# Altium PCB 智能输液器主板.pcbdoc
Units mil, origin at the board's own origin, x right, y up, seen from the top; angles counter-clockwise.
Board outline 5687.73 x 4055 mil, 2 copper layers (Top Layer, Bottom Layer); 58 components, 49 nets, 233 pads, 273 vias.
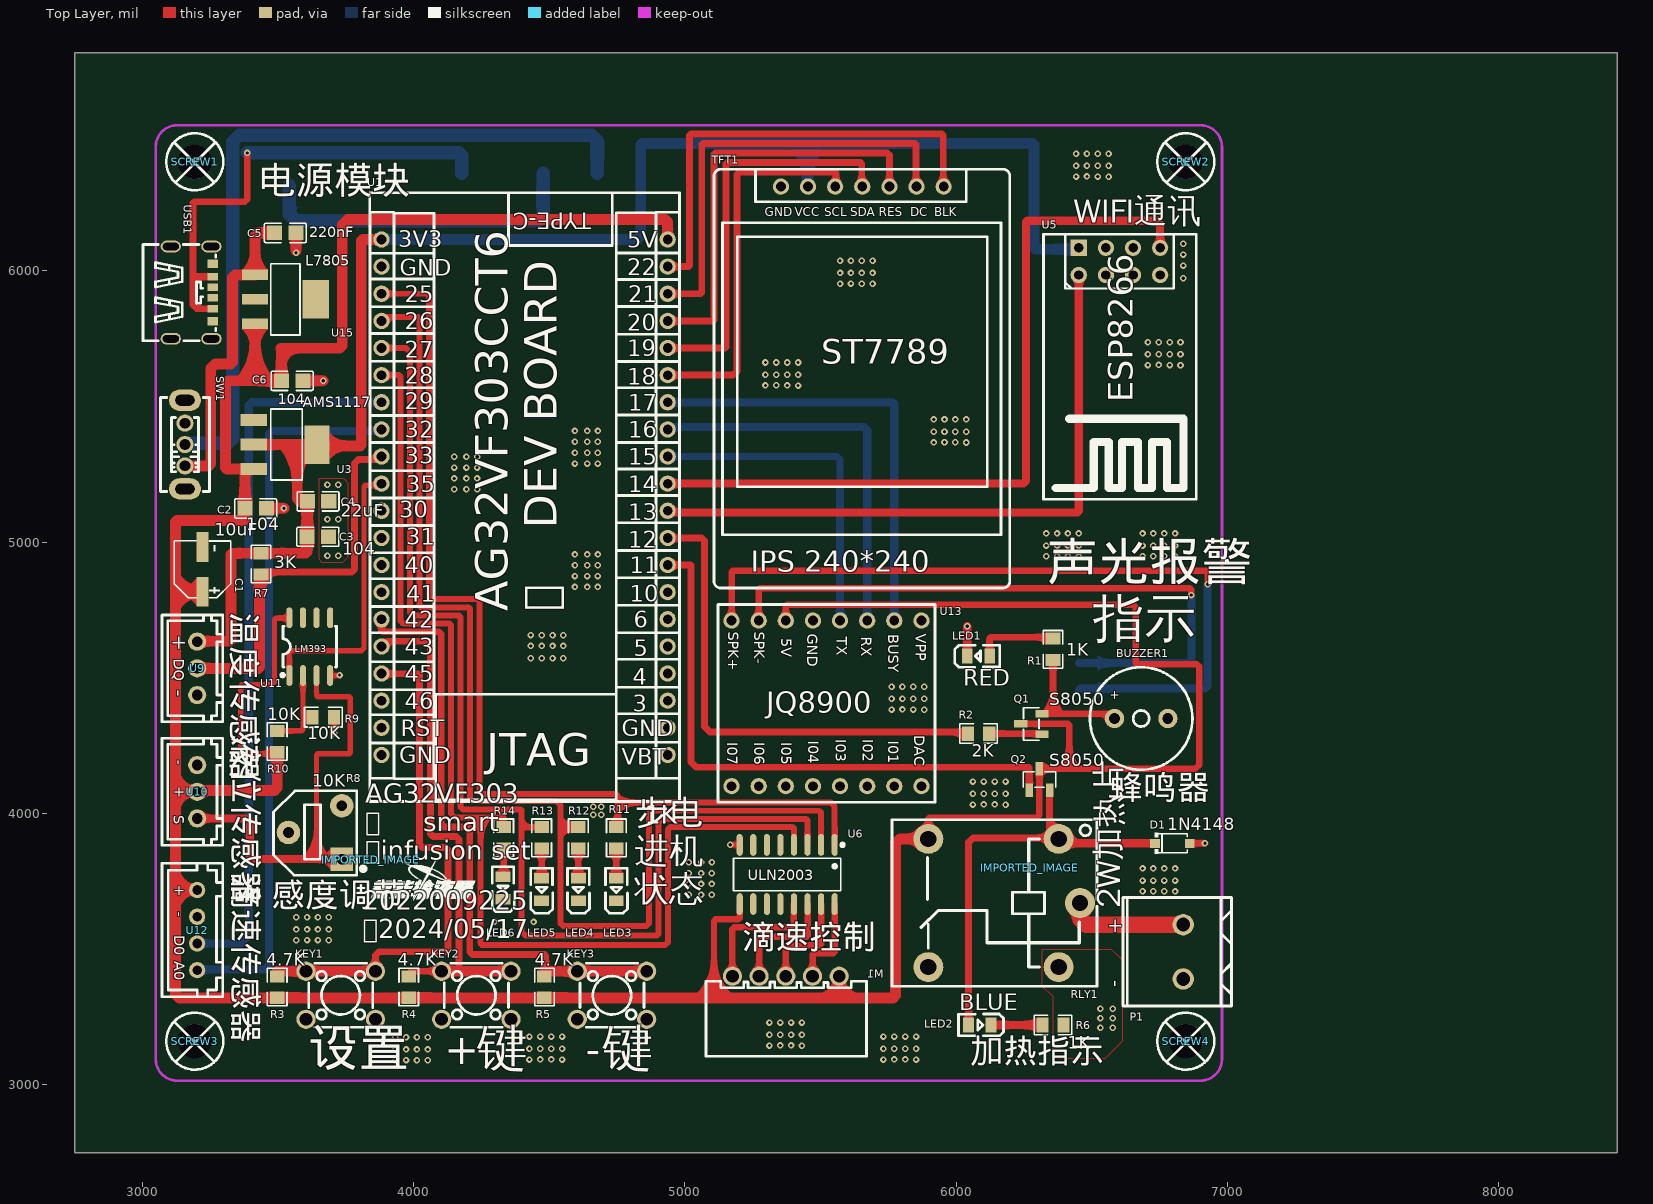
[diagram p0: Top Layer view]
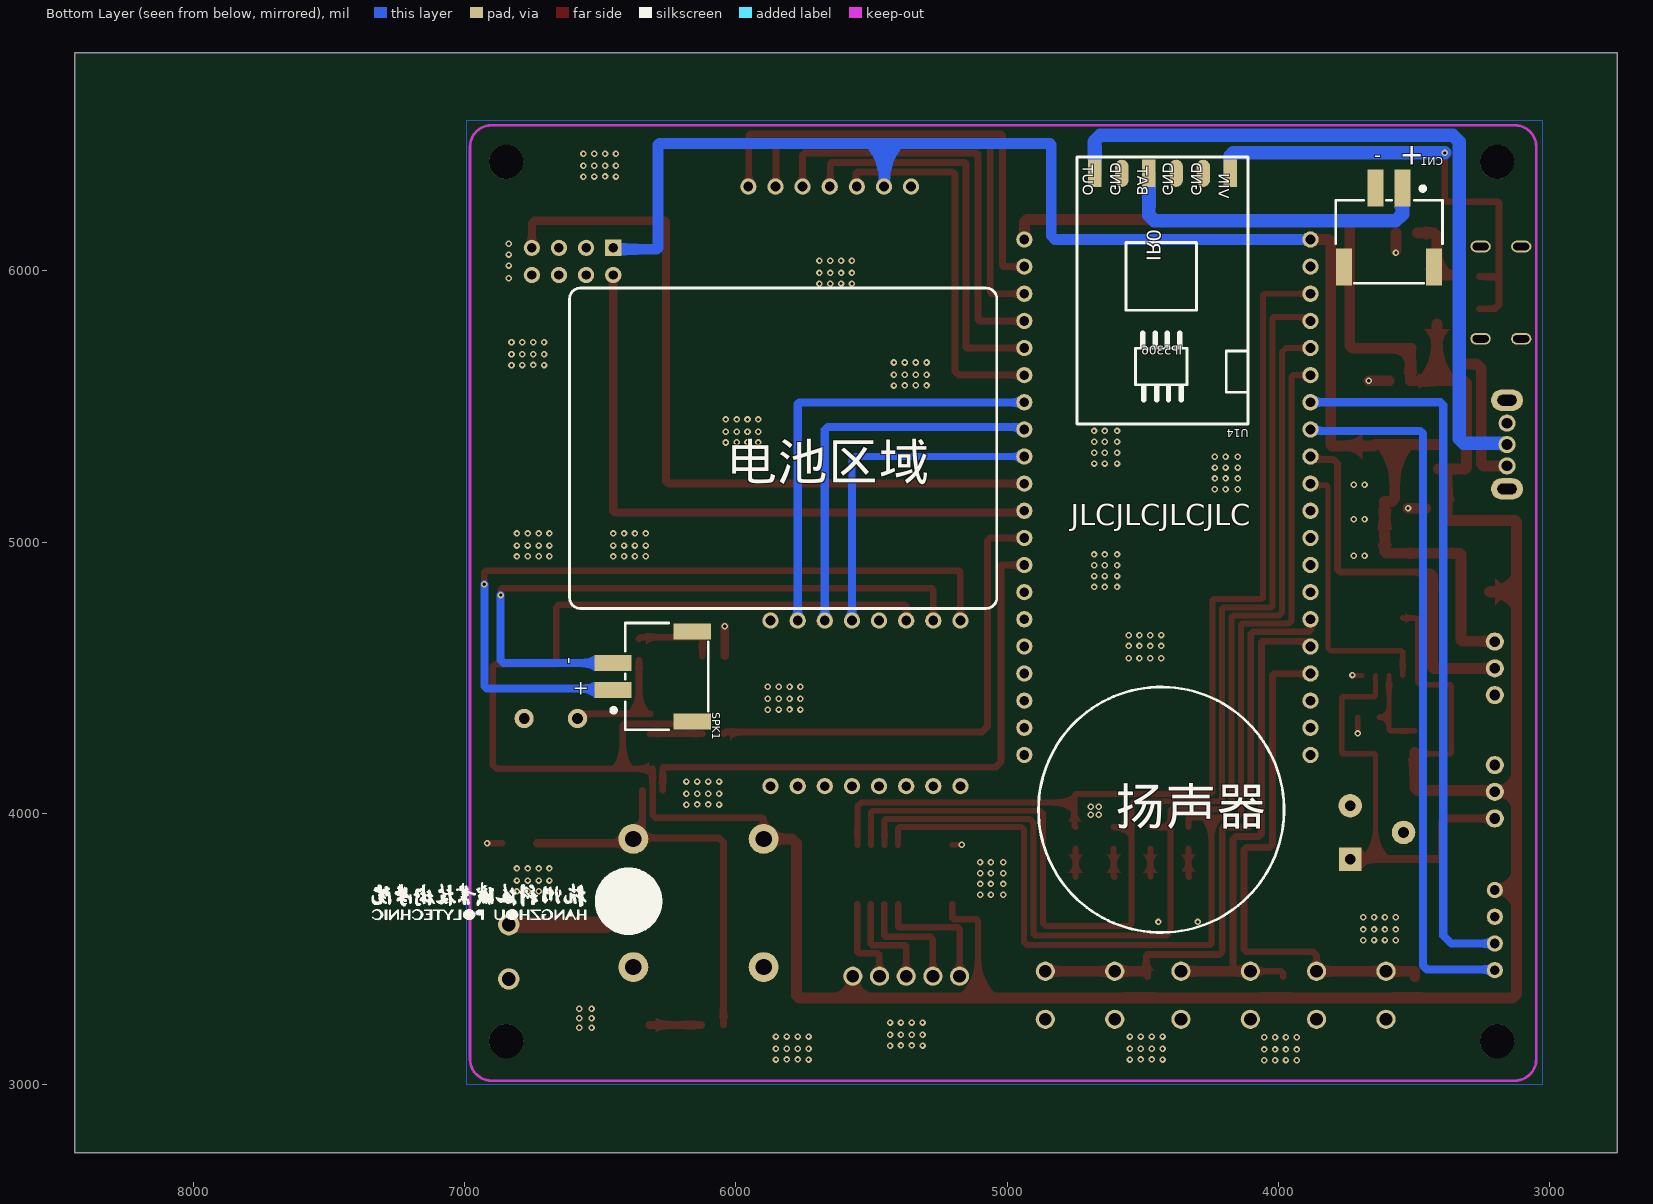
[diagram p1: Bottom Layer view, seen from below]

## Layer stack, top to bottom
Top Layer: signal copper (thickness not stored)
Dielectric: dielectric 12.6, FR-4, Dk 4.8
Bottom Layer: signal copper (thickness not stored)

## Board outline
8437.73,2750 2750,2750 2750,6805 8437.73,6805

## Components (designator, comment, footprint, x,y, rotation, side; value= is the part's Value field where it differs from the comment)
BUZZER1 "HNB09A05" BUZ-TH_BD9.6-P5.00-D0.7-FD 6681.99,4350 r0 top
C1 "RST10UF50V016" CAP-SMD_BD5.0-L5.3-W5.3-FD 3221.99,4900 r90 top
C2 "CC0805KRX7R9BB104" C0805 3417.62,5124.37 r180 top
C3 "CC0805KRX7R9BB104" C0805 3646.99,5020 r180 top
C4 "CL21A226MAQNNNE" C0805 3647.62,5150.63 r180 top
C5 "CL21B224KBFNNNE" C0805 3526.99,6140 r180 top
C6 "CC0805KRX7R9BB104" C0805 3551.99,5595 r180 top
CN1 "ZX-XH2.54-2PWT" conn-smd_2p-p2.54_megastar_zx-xh2.54-2pwt 3591.99,6160 r180 bottom
D1 "1N4148W_C727110" SOD-123_L3.1-W1.7-LS3.7-RD 6796.99,3890 r0 top
IMPORTED_IMAGE "IMPORTED_IMAGE" IMPORTED_IMAGE 6271.99,3800 r0 top
IMPORTED_IMAGE "IMPORTED_IMAGE" IMPORTED_IMAGE 3841.99,3830 r0 top
KEY1 "TS665CJ" SW-TH_4P-L6.0-W6.0-P4.50-LS6.5 3731.19,3329.74 r0 top
KEY2 "TS665CJ" SW-TH_4P-L6.0-W6.0-P4.50-LS6.5 4231.19,3329.74 r0 top
KEY3 "TS665CJ" SW-TH_4P-L6.0-W6.0-P4.50-LS6.5 4731.19,3329.74 r0 top
LED1 "NCD0805R1" LED0805-R-RD 6081.99,4580 r0 top
LED2 "NCD0805R1" LED0805-R-RD 6086.99,3220 r180 top
LED3 "NCD0805R1" LED0805-R-RD 4746.99,3720 r90 top
LED4 "NCD0805R1" LED0805-R-RD 4606.99,3720 r90 top
LED5 "NCD0805R1" LED0805-R-RD 4471.99,3720 r90 top
LED6 "NCD0805R1" LED0805-R-RD 4329.43,3725 r90 top
M1 "步进电机" conn-th_xh2.54-5aw 5371.99,3400 r0 top
P1 "WJ500V-5.08-2P" CONN-TH_2P-P5.00_WJ500V-5.08-2P 6836.99,3490 r90 top
Q1 "SS8050_C7420370" SOT-23-3_L2.9-W1.3-P1.90-LS2.4-BR 6276.99,4330 r0 top
Q2 "SS8050_C7420370" SOT-23-3_L2.9-W1.3-P1.90-LS2.4-BR 6306.99,4125 r270 top
R1 "0805W8F1001T5E" R0805 6356.99,4605 r90 top
R2 "0805W8F2001T5E" R0805 6082.62,4294.37 r0 top
R3 "0805W8F4701T5E" R0805 3496.99,3360 r270 top
R4 "0805W8F4701T5E" R0805 3981.99,3360 r270 top
R5 "0805W8F4701T5E" R0805 4481.99,3360 r270 top
R6 "0805W8F1001T5E" R0805 6356.99,3220 r0 top
R7 "0805W8F4701T5E" R0805 3436.99,4920 r270 top
R8 "RM065-103(10K)" RES-ADJ-SMD_RM065-V1 3636.99,3930 r90 top
R9 "0805W8F1002T5E_C17414" R0805 3666.99,4355 r180 top
R10 "0805W8F1002T5E_C17414" R0805 3496.99,4265 r270 top
R11 "0805W8F1001T5E" R0805 4746.99,3910 r270 top
R12 "0805W8F1001T5E" R0805 4606.99,3910 r270 top
R13 "0805W8F1001T5E" R0805 4471.99,3910 r270 top
R14 "0805W8F1001T5E" R0805 4331.99,3910 r270 top
RLY1 "SRD-05VDC-SL-C" RELAY-TH_SRD-XXVDC-XL-C 6176.99,3670 r180 top
SCREW1 "M3螺丝" M3螺丝 3195.69,6400 r0 top
SCREW2 "M3螺丝" M3螺丝 6849.07,6400 r0 top
SCREW3 "M3螺丝" M3螺丝 3195.73,3158.03 r0 top
SCREW4 "M3螺丝" M3螺丝 6849.07,3158 r0 top
SPK1 "扬声器" CONN-SMD_2P-P2.54_MEGASTAR_ZX-XH2.54-2PWT 6306.99,4505 r90 bottom
SW1 "SS12D07VG4 087" SW-TH_SS12D07VG4 3156.99,5360 r90 top
TFT1 "1.3寸TFT" 1.3寸TFT 5106.99,6375 r0 top
U1 "AG32F303DEVBOARD" "AG32VF303 DEV BOARD" 3836.99,4045 r0 top
U3 "AMS1117-3.3_C6186" SOT-223-3_L6.5-W3.4-P2.30-LS7.0-BR 3526.99,5360 r180 top
U5 "WIFI模块" ESP-01S 6451.99,5985 r0 top
U6 "ULN2003_C2829422" SOP-16_L9.9-W3.9-P1.27-LS6.0-BL 5376.99,3775 r180 top
U9 "DS18B20" DS18B20 3201.99,4535 r270 top
U10 "水位传感器" 水位传感器 3201.99,4080 r270 top
U11 "LM393DR" SOIC-8_L5.0-W4.0-P1.27-LS6.0-BL 3616.99,4615 r0 top
U12 "槽型光耦" 槽型光耦 3201.99,3570 r270 top
U13 "JQ8900" JQ8900 5921.99,4770 r270 top
U14 "充放电一体5V2A" 充放电一体5v2a 4111.99,6420 r0 bottom
U15 "LM7805MPX/NOPB" SOT-223-4_L6.5-W3.5-P2.30-LS7.0-BR 3526.99,5895 r180 top
USB1 "TYPE-C 6P(073)" TYPE-C-SMD_TYPE-C-6P 3181.99,5920 r270 top

## Footprints (in the part's own frame and the unit in brackets; to place one, negate y for a bottom-side part, rotate by r counter-clockwise, add the part's x,y. Pads: shape width x height; smd on the part's side, far side on the other; paste and mask are expansions set on the pad)
1.3寸TFT [mil]
  round 60 hole 36: 1(246.85,-64.17) 2(346.85,-64.17) 3(446.85,-64.17) 4(546.85,-64.17) 5(646.85,-64.17) 6(746.85,-64.17) 7(846.85,-64.17)
  silkscreen extent 0,-1544 1091,0
"AG32VF303 DEV BOARD" [mil]
  round 60 hole 36: 1(44.61,2070.87) 2(44.61,1970.87) 3(44.61,1870.87) 4(44.61,1770.87) 5(44.61,1670.87) 6(44.61,1570.87) 7(44.61,1470.87) 8(44.61,1370.87) 9(44.61,1270.87) 10(44.61,1170.87) 11(44.61,1070.87) 12(44.61,970.87) 13(44.61,870.87) 14(44.61,770.87) 15(44.61,670.87) 16(44.61,570.87) 17(44.61,470.87) 18(44.61,370.87) 19(44.61,270.87) 20(44.61,170.87) 21(1099.49,170.87) 22(1099.49,270.87) 23(1099.49,370.87) 24(1099.49,470.87) 25(1099.49,570.87) 26(1099.49,670.87) 27(1099.49,770.87) 28(1099.49,870.87) 29(1099.49,970.87) 30(1099.49,1070.87) 31(1099.49,1170.87) 32(1099.49,1270.87) 33(1099.49,1370.87) 34(1099.49,1470.87) 35(1099.49,1570.87) 36(1099.49,1670.87) 37(1099.49,1770.87) 38(1099.49,1870.87) 39(1099.49,1970.87) 40(1099.49,2070.87)
  silkscreen extent 1,-1 1143,2243
BUZ-TH_BD9.6-P5.00-D0.7-FD [mm]
  round 1.8 hole 1: 1(-2.5,0) 2(2.5,0)
  silkscreen extent -4.8,-4.8 4.8,4.8
C0805 [mm]
  rect 1.41x1.35 smd: 1(-1,0) 2(1,0)
  silkscreen extent -1.96,-0.9 1.96,0.9
CAP-SMD_BD5.0-L5.3-W5.3-FD [mm]
  rect 2.8x1.1 smd: 1(-2.1,0) 2(2.1,0)
  silkscreen extent -2.66,-2.62 2.66,2.65
conn-smd_2p-p2.54_megastar_zx-xh2.54-2pwt [mm]
  rect 1.5x3.5 smd: 1(1.25,3.7) 2(-1.25,3.7) 3(4.23,-3.7) 4(-4.23,-3.7)
  silkscreen extent -5,-5.21 5,3.85
CONN-SMD_2P-P2.54_MEGASTAR_ZX-XH2.54-2PWT [mm]
  rect 1.5x3.5 smd: 1(-1.25,3.7) 2(1.25,3.7) 3(-4.23,-3.7) 4(4.23,-3.7)
  silkscreen extent -5,-5.21 5,3.85
CONN-TH_2P-P5.00_WJ500V-5.08-2P [mm]
  round 2 hole 1.3: 1(-2.54,0) 2(2.54,0)
  silkscreen extent -5.08,-4.52 5.08,5.64
conn-th_xh2.54-5aw [mm]
  round 1.8 hole 1.199 copper offset 0,0: 1(-5,0) 2(-2.498,0) 3(0.002,0) 4(2.501,0) 5(5,0)
  silkscreen extent -7.48,-7.49 7.55,-0.48
DS18B20 [mm]
  round 1.7 hole 1: 1(-2.5,0) 2(0,0) 3(2.5,0)
  silkscreen extent -5,-3.3 5,2.4
ESP-01S [mil]
  rect 60x60 hole 35: 1(0,100)
  round 60 hole 35: 2(100,100) 3(200,100) 4(300,100) 5(0,0) 6(100,0) 7(200,0) 8(300,0)
  silkscreen extent -130,-826 433,150
IMPORTED_IMAGE [mil]
JQ8900 [mil]
  round 60 hole 36: 1(59.06,-50) 2(59.06,-150) 3(59.06,-250) 4(59.06,-350) 5(59.06,-450) 6(59.06,-550) 7(59.06,-650) 8(59.06,-750) 9(669.29,-750) 10(669.29,-650) 11(669.29,-550) 12(669.29,-450) 13(669.29,-350) 14(669.29,-250) 15(669.29,-150) 16(669.29,-50)
  silkscreen extent 0,-800 728,0
LED0805-R-RD [mm]
  rect 1x1.4 smd: 1(1.05,0) 2(-1.05,0)
  silkscreen extent -2.22,-1.04 1.99,1.01
M3螺丝 [mil]
  round 126 hole 126: 1(-2.5,2.5)
  silkscreen extent -107,-102 102,107
R0805 [mm]
  rect 1.133x1.377 smd: 1(-1,0) 2(1,0)
  silkscreen extent -1.76,-0.92 1.76,0.92
RELAY-TH_SRD-XXVDC-XL-C [mil]
  round 110 hole 60: 1(-200.79,-236.22) 2(279.52,-236.2) 3(279.53,236.2) 4(-200.79,236.22) 5(-279.53,0)
  silkscreen extent -342,-307 413,307
RES-ADJ-SMD_RM065-V1 [mm]
  rect 2.2x2.1 hole 1: 1(-2.5,-2.5)
  round 2.2 hole 1: 2(0,2.5) 3(2.5,-2.5)
  silkscreen extent -4,-4.7 3.9,3.9
SOD-123_L3.1-W1.7-LS3.7-RD [mm]
  rect 0.91x0.84 smd: 1(-1.63,0) 2(1.63,0)
  silkscreen extent -1.63,-0.98 1.4,0.98
SOIC-8_L5.0-W4.0-P1.27-LS6.0-BL [mil]
  oval 22.38x76.78 smd: 1(-75,-106.5) 2(-25,-106.5) 3(25,-106.5) 4(75,-106.5) 5(75,106.5) 6(25,106.5) 7(-25,106.5) 8(-75,106.5)
  silkscreen extent -106,-111 98,75
SOP-16_L9.9-W3.9-P1.27-LS6.0-BL [mil]
  oval 22.6x80.24 smd: 1(-175,-109.02) 2(-125,-109.02) 3(-75,-109.02) 4(-25,-109.02) 5(25,-109.02) 6(75,-109.02) 7(125,-109.02) 8(175,-109.02) 9(175,109.02) 10(125,109.02) 11(75,109.02) 12(25,109.02) 13(-25,109.02) 14(-75,109.02) 15(-125,109.02) 16(-175,109.02)
  silkscreen extent -210,-115 198,60
SOT-23-3_L2.9-W1.3-P1.90-LS2.4-BR [mm]
  rect 1.25x0.7 smd: 1(1,-0.95) 2(1,0.95) 3(-1,0)
  silkscreen extent -0.73,-1.53 0.73,1.53
SOT-223-3_L6.5-W3.4-P2.30-LS7.0-BR [mm]
  rect 2.5x1.1 smd: 1(2.97,-2.3) 2(2.97,0) 3(2.97,2.3)
  rect 2.34x3.6 smd: 4(-2.97,0)
  silkscreen extent -1.57,-3.33 1.37,3.33
SOT-223-4_L6.5-W3.5-P2.30-LS7.0-BR [mm]
  rect 2.47x0.98 smd: 1(2.835,-2.3) 2(2.835,0) 3(2.835,2.3)
  rect 2.47x3.6 smd: 4(-2.835,0)
  silkscreen extent -1.37,-3.33 1.37,3.33
SW-TH_4P-L6.0-W6.0-P4.50-LS6.5 [mm]
  round 1.8 hole 1.2: 1(-3.25,2.25) 2(3.25,2.25) 3(-3.25,-2.25) 4(3.25,-2.25)
  silkscreen extent -3,-3 3,3
SW-TH_SS12D07VG4 [mm]
  round 1.6 hole 1: 1(-2,0) 2(0,0) 3(2,0)
  oval 2x3 hole 1 slot 1.8 at 90 deg: 4(4.15,0) 5(-4.15,0)
  silkscreen extent -4.4,-2.3 4.4,2.3
TYPE-C-SMD_TYPE-C-6P [mm]
  oval 1.1x1.9 hole 0.7 slot 1.5 at 90 deg: 7(-4.32,-1.963) 7(-4.32,1.838) 7(4.32,-1.963) 7(4.32,1.838)
  rect 0.7x1 smd: A5(-0.5,1.963) A9(1.5,1.963) B5(0.5,1.963) B9(-1.5,1.963)
  rect 0.8x1 smd: A12(2.7,1.963) B12(-2.7,1.963)
  silkscreen extent -4.5,-4.56 4.5,2.24
充放电一体5v2a [mil]
  rect 50x100 smd: 1(65,60) 4(365,60) 6(565,60)
  oval 50x100 smd: 2(165,60) 3(265,60) 5(465,60)
  silkscreen extent 0,0 630,984
槽型光耦 [mil]
  round 60 hole 36: 1(-147.64,0) 2(-49.21,0.01) 3(49.21,0) 4(147.64,0.01)
  silkscreen extent -246,-130 246,94
水位传感器 [mm]
  round 1.7 hole 1: 1(-2.5,0) 2(0,0) 3(2.5,0)
  silkscreen extent -5,-3.3 5,2.4

## Via types
v1: diameter 24.02, hole 12.01, Top Layer to Bottom Layer, 273 vias

## Nets (pads, with @x,y where several pads share a name; then routed paths per layer and width w, separated by ;. In a path a pad name is that pad's centre, name@x,y a point inside that pad or via, vN(x,y) a via of type N, cw(c..) or ccw(c..) an arc to the next point about the centre after c; other vN are vias at no path point)
8266_RX: U1.30 U5.5 | length 2381.7
  Top Layer w30: U1.30@4942.34,5110 6446.99,5110 6451.99,5115 U5.5
8266_TX: U1.31 U5.4 | length 2870.5
  Top Layer w30: U1.31 6247.85,5215.87 6256.99,5225 6256.99,6180 6261.99,6185 6741.99,6185 6751.99,6175 U5.4
$1N2864: LED1.1 R1.2 | length 303.8
  Top Layer w24: LED1.1 6123.34,4646.35 6126.99,4650 6351.36,4650 R1.2
$1N2874: BUZZER1.1 Q1.2 R1.1 | length 474.7
  Top Layer w24: Q1.2 6361.93,4367.4 ; R1.1 6356.99,4372.35 6361.93,4367.4 ; BUZZER1.1 6566.16,4367.4 6361.93,4367.4
$1N2928: Q1.1 R2.2 | length 195.1
  Top Layer w24: R2.2 6314.59,4294.37 Q1.1
$1N8956: P1.2 RLY1.5 | length 447.8
  Top Layer w60: RLY1.5 6456.52,3611.57 6478.09,3590 P1.2
$1N9207: LED2.2 R6.1 | length 189.3
  Top Layer w30: LED2.2 R6.1
$1N9226: D1.1 LED2.1 Q2.2 RLY1.1 | length 1563.8
  Top Layer w25: LED2.1 6045.64,3893.65 6061.99,3910 RLY1.1@6374,3910 ; Q2.2 6344.39,3939.61 RLY1.1@6374,3910 ; RLY1.1 RLY1.1@6374,3910
  Top Layer w30: RLY1.1 6394,3890 D1.1
$1N18974: R9.2 R10.1 U11.2 | length 333.5
  Top Layer w20: R10.1 3586.36,4304.37 3591.99,4310 3591.99,4360 ; U11.2 3591.99,4360 ; R9.2 3596.99,4355 3591.99,4360
$1N21189: SPK1.1 U13.8 | length 2838.4
  Top Layer w24: U13.8 5171.99,4890 5176.99,4895 6921.99,4895 6926.98,4890.01 v1(6926.99,4845)
  Bottom Layer w30: SPK1.1 6456.88,4460 6916.99,4460 6926.99,4470 v1(6926.99,4845)
$1N21198: SPK1.2 U13.7 | length 2392
  Top Layer w24: U13.7 5271.99,4825 5276.99,4830 6861.99,4830 6866.99,4825 v1(6866.99,4805)
  Bottom Layer w30: SPK1.2 6856.2,4554.22 6866.99,4565 v1(6866.99,4805)
$1N31746: LED3.1 R11.2 | length 104.3
  Top Layer w22: LED3.1@4746.99,3766.35 R11.2
$1N31792: LED4.1 R12.2 | length 105.3
  Top Layer w22: LED4.1@4604.47,3766.35 4606.99,3768.87 R12.2
$1N31838: LED5.1 R13.2 | length 102.7
  Top Layer w22: LED5.1@4471.99,3767.94 R13.2
$1N31884: LED6.1 R14.2 | length 105.3
  Top Layer w22: LED6.1 4331.99,3768.91 R14.2
+5V: C1.1 C2.2 C6.2 M1.5 Q1.3 Q2.3 R3.2 R4.2 R5.2 R10.2 RLY1.2 U1.40 U3.3 U6.9 U10.2 U11.8 U12.1 U13.6 U15.3 | length 14222.9
  Top Layer w20: R10.2 3491.36,4220 3366.99,4220 3361.99,4225 3361.99,4470 3366.99,4475 3476.99,4475 3486.99,4485 3486.99,4715 3491.99,4720 3540.49,4720 U11.8
  Top Layer w23: 5106.99,3320 5106.99,3604.02 5112.97,3610 5196.99,3610 5201.99,3615 U6.9
  Top Layer w24: U13.6 5371.99,4765 5376.99,4770 6651.99,4770 6661.99,4760 6661.99,4555 6666.99,4550 6886.99,4550 6896.99,4540 6896.99,4180 6881.36,4164.37 6411.36,4164.37 ; RLY1.2 5897.46,3980.47 5901.99,3985 6296.99,3985 6306.99,3995 Q2.3 6411.36,4164.37 ; Q1.3 6411.99,4330 6416.99,4325 6416.99,4170 6411.36,4164.37
  Top Layer w40: U12.1 3199.63,3720 3126.99,3720 3121.99,3725 ; C1.1 3121.99,4817.32 ; U3.3 U3.3@3396.44,5269.45 ; U15.3 3415.38,5595.39 3414.99,5595 ; R10.2 3496.99,4095 3486.99,4085 3206.99,4085 U10.2 3198.74,4083.24 3121.99,4083.24 ; U1.40 4936.47,6180.51 4926.99,6190 3756.99,6190 3736.99,6170 3736.99,5725 3726.99,5715 3511.06,5715 3512.62,5713.45 C6.2 3414.99,5595 ; M1.5 5568.84,3322.92 5571.75,3320 ; RLY1.2 5793.19,3906.2 5776.99,3890 5776.99,3330 5766.99,3320 5571.75,3320 ; 3121.99,3725 3121.99,3335 3136.99,3320 5106.99,3320 5571.75,3320 ; 3121.99,3725 3121.99,4083.24 ; 3121.99,4083.24 3121.99,4817.32 ; 3121.99,4817.32 3121.99,5075 3126.99,5080 3371.99,5080 3378.25,5086.26 C2.2 3378.25,5251.26 U3.3@3396.44,5269.45 ; U3.3@3396.44,5269.45 3312.54,5269.45 3306.99,5275 3306.99,5585 3316.99,5595 3414.99,5595
A0: U1.8 U12.4 | length 2650.2
  Bottom Layer w30: U12.4 3204.63,3425 3451.99,3425 3466.99,3440 3466.99,5400 3476.99,5410 U1.8@3880.73,5410
ALARM: R2.1 U1.29 | length 1806.9
  Top Layer w25: U1.29 4937.34,5015 5061.99,5015 5071.99,5005 5071.99,4320 5091.99,4300 6037.62,4300 R2.1
D0: U1.7 U12.3 | length 2651.7
  Bottom Layer w30: U12.3 3362.78,3520.79 3391.99,3550 3391.99,5505.87 3401.99,5515.87 U1.7
GND: BUZZER1.2 C1.2 C2.1 C3.1 C4.1 C5.1 C6.1 CN1.2 CN1.3 CN1.4 D1.2 KEY1.3 KEY1.4 KEY2.3 KEY2.4 KEY3.3 KEY3.4 LED1.2 LED3.2 LED4.2 LED5.2 LED6.2 P1.1 R6.2 R8.2 R8.3 R9.1 RLY1.4 SCREW1.1 SCREW2.1 SCREW3.1 SCREW4.1 TFT1.1 U1.2 U1.20 U1.22 U3.1 U5.8 U6.8 U9.3 U10.1 U11.4 U12.2 U13.5 U14.2 U14.3 U14.5 U15.2 U15.4 USB1.A12 USB1.B12 | length 503
  Top Layer w20: U11.4 3725.49,4508.5 v1(3726.99,4510) ; R9.1 3706.99,4354.37 v1(3706.99,4295) ; v1(5166.99,3885) 5201.01,3885 U6.8
  Top Layer w25: D1.2 v1(6916.99,3890)
  Top Layer w30: LED1.2 v1(6040.64,4690)
  Top Layer w40: C2.1 3457.62,5125 v1(3521.99,5125) ; v1@3566.36,6075 C5.1 ; C6.1 v1(3666.99,5595)
  other v1: 3931.99,3090.37 4051.99,3090.09 3971.99,3090.92 4011.99,3090.64 4426.99,3092.82 4466.99,3093.38 4506.99,3093.1 4546.99,3092.54 5731.99,3092.82 5771.99,3093.38 5811.99,3093.1 5851.99,3092.54 3931.99,3130 3971.99,3130 4011.99,3130 4051.99,3130 4426.99,3132.46 4466.99,3132.46 4506.99,3132.46 4546.99,3132.46 5731.99,3132.46 5771.99,3132.46 5811.99,3132.46 5851.99,3132.46 5311.42,3144.34 5431.42,3144.07 5351.42,3144.9 5391.42,3144.62 3931.99,3175 3971.99,3175 4011.99,3175 4051.99,3175 4426.99,3177.46 4466.99,3177.46 4506.99,3177.46 4546.99,3177.46 5731.99,3177.46 5771.99,3177.46 5811.99,3177.46 5851.99,3177.46 5311.42,3183.98 5351.42,3183.98 5391.42,3183.98 5431.42,3183.98 6531.99,3210 6576.99,3210 5311.42,3228.98 5351.42,3228.98 5391.42,3228.98 5431.42,3228.98 6531.99,3245 6576.99,3245 6531.99,3280 6576.99,3280 3566.99,3532.82 3606.99,3533.38 3646.99,3533.1 3686.99,3532.54 3566.99,3572.46 3606.99,3572.46 3646.99,3572.46 3686.99,3572.46 4296.99,3600 4441.99,3600 3566.99,3617.46 3606.99,3617.46 3646.99,3617.46 3686.99,3617.46 5014.53,3700 5059.53,3700 5099.16,3700 6686.99,3712.82 6726.99,3713.38 6766.99,3713.1 6806.99,3712.54 5014.53,3740 5059.53,3740 5098.61,3740 6686.99,3752.46 6726.99,3752.46 6766.99,3752.46 6806.99,3752.46 5014.53,3780 5059.53,3780 5098.88,3780 6686.99,3797.46 6726.99,3797.46 6766.99,3797.46 6806.99,3797.46 5014.53,3820 5059.53,3820 5099.44,3820 4661.99,3995 4691.99,3995 4661.99,4025 4691.99,4025 6061.99,4032.82 6101.99,4033.38 6141.99,4033.1 6181.99,4032.54 6061.99,4072.46 6101.99,4072.46 6141.99,4072.46 6181.99,4072.46 6061.99,4117.46 6101.99,4117.46 6141.99,4117.46 6181.99,4117.46 5761.99,4382.82 5801.99,4383.38 5841.99,4383.1 5881.99,4382.54 5761.99,4422.46 5801.99,4422.46 5841.99,4422.46 5881.99,4422.46 5761.99,4467.46 5801.99,4467.46 5841.99,4467.46 5881.99,4467.46 4431.99,4572.54 4471.99,4572.54 4511.99,4572.54 4551.99,4572.54 4431.99,4617.54 4471.99,4617.54 4511.99,4617.54 4551.99,4617.54 4431.99,4657.46 4471.99,4656.9 4511.99,4656.62 4551.99,4657.18 4594.53,4835 4639.53,4835 4679.16,4835 4594.53,4875 4639.53,4875 4678.61,4875 4594.53,4915 4639.53,4915 4678.88,4915 6331.99,4947.82 6371.99,4948.38 6411.99,4948.1 6451.99,4947.54 6686.99,4947.82 6726.99,4948.38 6766.99,4948.1 6806.99,4947.54 3681.99,4950 3721.99,4950 4594.53,4955 4639.53,4955 4679.44,4955 6331.99,4987.46 6371.99,4987.46 6411.99,4987.46 6451.99,4987.46 6686.99,4987.46 6726.99,4987.46 6766.99,4987.46 6806.99,4987.46 6331.99,5032.46 6371.99,5032.46 6411.99,5032.46 6451.99,5032.46 6686.99,5032.46 6726.99,5032.46 6766.99,5032.46 6806.99,5032.46 3681.99,5085 3721.99,5085 4149.53,5195 4194.53,5195 4234.16,5195 3681.99,5211.98 3721.99,5211.98 4149.53,5235 4194.53,5235 4233.61,5235 4149.53,5275 4194.53,5275 4233.88,5275 4594.53,5290 4639.53,5290 4679.16,5290 4149.53,5315 4194.53,5315 4234.44,5315 4594.53,5330 4639.53,5330 4678.61,5330 5916.99,5367.82 5956.99,5368.38 5996.99,5368.1 6036.99,5367.54 4594.53,5370 4639.53,5370 4678.88,5370 5916.99,5407.46 5956.99,5407.46 5996.99,5407.46 6036.99,5407.46 4594.53,5410 4639.53,5410 4679.44,5410 5916.99,5452.46 5956.99,5452.46 5996.99,5452.46 6036.99,5452.46 5296.99,5577.82 5336.99,5578.38 5376.99,5578.1 5416.99,5577.54 5296.99,5617.46 5336.99,5617.46 5376.99,5617.46 5416.99,5617.46 6706.99,5652.82 6746.99,5653.38 6786.99,5653.1 6826.99,5652.54 5296.99,5662.46 5336.99,5662.46 5376.99,5662.46 5416.99,5662.46 6706.99,5692.46 6746.99,5692.46 6786.99,5692.46 6826.99,5692.46 6706.99,5737.46 6746.99,5737.46 6786.99,5737.46 6826.99,5737.46 5571.99,5952.82 5611.99,5953.38 5651.99,5953.1 5691.99,5952.54 6836.99,5972.94 5571.99,5992.46 5611.99,5992.46 5651.99,5992.46 5691.99,5992.46 6836.99,6020 5571.99,6037.46 5611.99,6037.46 5651.99,6037.46 5691.99,6037.46 6836.99,6060.53 3566.36,6067.28 6836.99,6100 6441.99,6347.82 6481.99,6348.38 6521.99,6348.1 6561.99,6347.54 6441.99,6387.46 6481.99,6387.46 6521.99,6387.46 6561.99,6387.46 6441.99,6432.46 6481.99,6432.46 6521.99,6432.46 6561.99,6432.46
IN1: R11.1 U1.3 U6.1 | length 3769.4
  Top Layer w22: U1.3 4051.12,5915.87 4056.99,5910 4056.99,4795 4061.99,4790 4237.89,4790 4241.99,4785.91 4241.99,4080 4250.99,4071 4745.99,4071 4751.99,4065 4751.99,4040 ; R11.1 4751.99,3954.37 4751.99,4040 ; U6.1 5551.99,4026.29 5538.28,4040 4751.99,4040
IN2: R12.1 U1.4 U6.2 | length 4443.9
  Top Layer w22: U1.4 3895.73,5830 4016.99,5830 4021.99,5825 4021.99,4765 4026.99,4760 4201.99,4760 4206.99,4755 4206.99,4055 4216.99,4045 4526.99,4045 4541.99,4030 4541.99,3945 ; R12.1 4546.36,3949.37 4541.99,3945 ; U6.2 5501.99,4003 5494.99,4010 4876.99,4010 4866.99,4000 4866.99,3595 4856.99,3585 4551.99,3585 4541.99,3595 4541.99,3945
IN3: R13.1 U1.5 U6.3 | length 4292.1
  Top Layer w22: U1.5 3971.12,5715.87 3986.99,5700 3986.99,4740 3996.99,4730 4166.99,4730 4171.99,4725 4171.99,4025 4181.99,4015 4394.11,4015 4396.99,4012.12 4396.99,3940 ; R13.1 4406.36,3949.37 4396.99,3940 ; U6.3 5451.99,3975 5446.99,3980 4916.99,3980 4901.99,3965 4901.99,3555 4896.99,3550 4411.99,3550 4396.99,3565 4396.99,3940
IN4: R14.1 U1.6 U6.4 | length 4203.4
  Top Layer w22: U1.6 3946.12,5615.87 3951.99,5610 3951.99,4710 3961.99,4700 4131.99,4700 4136.99,4695 4136.99,4000 4151.99,3985 4246.99,3985 ; R14.1 4331.99,3985 4246.99,3985 ; U6.4 5401.99,3944.37 5396.99,3949.37 4946.36,3949.37 4936.99,3940 4936.99,3525 4926.99,3515 4251.99,3515 4246.99,3520 4246.99,3985
JQ_BUSY: U1.34 U13.2 | length 1621
  Bottom Layer w30: U1.34@4951.59,5515 5766.12,5515 5771.99,5509.13 U13.2
JQ_RX: U1.33 U13.3 | length 1428.1
  Bottom Layer w30: U1.33@4951.59,5425 5661.12,5425 5671.99,5414.13 U13.3
JQ_TX: U1.32 U13.4 | length 1234.1
  Bottom Layer w25: U1.32 5561.12,5315.87 5571.99,5305 5571.99,5224.13
  Bottom Layer w30: U13.4 5571.99,5224.13
K1: KEY1.1 KEY1.2 R3.1 U1.17 | length 1963.4
  Top Layer w25: KEY1.2 3859.14,3477.15 3871.99,3490 4116.99,3490 4126.99,3500 4126.99,3865 4116.99,3875 4031.99,3875 4021.99,3885 4021.99,4510 4016.99,4515 3882.46,4515 U1.17
  Top Layer w40: R3.1 3496.99,3418.32 KEY1.1 KEY1.2
K2: KEY2.1 KEY2.2 R4.1 U1.16 | length 1886.5
  Top Layer w25: U1.16 3900.73,4635 4056.99,4635 4061.99,4630 4061.99,3925 4071.99,3915 4156.99,3915 4166.99,3905 4166.99,3418.39 ; R4.1 3981.99,3410 3990.31,3418.32 KEY2.1
  Top Layer w40: KEY2.1 KEY2.2
K3: KEY3.1 KEY3.2 R5.1 U1.15 | length 2271.6
  Top Layer w25: U1.15 3881.59,4675.39 3886.99,4670 4091.99,4670 4101.99,4660 4101.99,3960 4111.99,3950 4201.99,3950 4206.99,3945 4206.99,3490 4216.99,3480 4481.99,3480 4486.99,3475 4486.99,3413.32 4486.99,3404.37 R5.1
  Top Layer w40: R5.1@4486.99,3413.32 4491.99,3418.32 KEY3.1 KEY3.2
O1: M1.1 U6.13 | length 485.9
  Top Layer w24: M1.1 5175.14,3573.15 5181.99,3580 5396.99,3580 5401.99,3585 U6.13
O2: M1.2 U6.14 | length 436.5
  Top Layer w24: M1.2 5273.64,3536.65 5281.99,3545 5446.99,3545 5451.99,3550 U6.14
O3: M1.3 U6.15 | length 390.1
  Top Layer w24: M1.3 5372.04,3510.05 5376.99,3515 5496.99,3515 5501.99,3520 U6.15
O4: M1.4 U6.16 | length 340.8
  Top Layer w24: M1.4 5470.44,3478.45 5476.99,3485 5546.99,3485 5551.99,3490 U6.16
RELAY: Q2.1 U1.28 | length 2149.6
  Top Layer w25: U1.28 5021.12,4915.87 5021.99,4915 5021.99,4190 5041.99,4170 6266.99,4170 6269.59,4167.4 Q2.1
TEMP: R7.2 U1.9 U9.2 | length 1419.2
  Top Layer w25: R7.2@3441.99,4890 3771.99,4890 3781.99,4900 3781.99,5290 3796.99,5305 3870.73,5305 U1.9
  Top Layer w40: U9.2 3426.98,4534.99 3431.99,4540 3431.99,4875.63 R7.2
TFT_BLK: TFT1.7 U1.39 | length 1691.3
  Top Layer w25: U1.39 5012.85,6015.87 5016.99,6020 5016.99,6500 5021.99,6505 5946.99,6505 5951.99,6500 5951.99,6312.68 TFT1.7
TFT_DC: TFT1.6 U1.38 | length 1620.8
  Top Layer w25: U1.38 5056.99,5915.87 5061.99,5920.87 5061.99,6465 5066.99,6470 5846.99,6470 5851.99,6465 5851.99,6312.68 TFT1.6
TFT_MOSI: TFT1.4 U1.36 | length 1481.3
  Top Layer w25: U1.36 5147.85,5715.87 5151.99,5720 5151.99,6395 5156.99,6400 5646.99,6400 5651.99,6395 5651.99,6312.68 TFT1.4
TFT_RES: TFT1.5 U1.37 | length 1551.4
  Top Layer w25: U1.37 4937.34,5815 5101.99,5815 5106.99,5820 5106.99,6430 5111.99,6435 5745.99,6435 5753.84,6427.15 TFT1.5
TFT_SCK: TFT1.3 U1.35 | length 1408.1
  Top Layer w25: U1.35 5177.85,5615.87 5191.99,5630 5191.99,6355 5201.99,6365 5551.99,6365 5556.99,6360 5556.99,6313.98 TFT1.3
VBAT: CN1.1 U14.4 | length 1213.5
  Bottom Layer w50: CN1.1@3541.99,6314.89 3541.99,6210 3566.99,6185 4456.99,6185 4476.99,6205 U14.4
VCC: C3.2 C4.2 R7.1 TFT1.2 U1.1 U3.2 U3.4 U5.1 U9.1 | length 5841.3
  Top Layer w40: U9.1 3203.56,4635 3321.99,4635 3326.99,4640 3326.99,4955 3331.36,4959.37 R7.1 3601.36,4959.37 3606.99,4965 3606.99,5019.37 C3.2 3608.25,5020.63 C4.2 3581.36,5150.63 3570.7,5161.29 3570.7,5360 ; U3.2 3570.7,5360 ; U1.1 3812.85,6115.87 3806.99,6110 3806.99,5360 3801.99,5355 3648.91,5355 U3.4 3570.7,5360
  Bottom Layer w40: U1.1 4822.85,6115.87 4836.99,6130 4836.99,6465 4841.99,6470 5446.99,6470 ; TFT1.2 5451.99,6312.68 5451.99,6465 5446.99,6470 ; U5.1@6451.99,6080 6291.99,6080 6286.99,6085 6286.99,6465 6281.99,6470 5446.99,6470
VIN: U14.1 USB1.A9 USB1.B9 | length 1766.5
  Top Layer w25: USB1.A9 3201.04,5860.94 3186.99,5875 3186.99,5965 ; USB1.B9 3201.04,5979.06 3186.99,5965 ; v1(3386.99,6435) 3386.99,6265 3376.99,6255 3191.99,6255 3186.99,6250 3186.99,5965
  Bottom Layer w50: v1(3386.99,6435) 4166.99,6435 4176.99,6425 U14.1
VOUT: SW1.2 U14.6 | length 2762.1
  Bottom Layer w50: SW1.2 3161.99,5365 3316.99,5365 3332.99,5381 3332.99,6476 3357.19,6500.21 4656.78,6500.21 4676.99,6480 U14.6
VSW: C5.2 SW1.1 U15.1 | length 1156.6
  Top Layer w40: SW1.1 3243.25,5281.26 3251.99,5290 3251.99,5640 3269.07,5657.09 3324.07,5657.09 3331.99,5665 3331.99,5975 3342.54,5985.55 U15.1 3415.38,6128.39 3426.99,6140 C5.2
WOUT: U1.10 U11.1 | length 1031.8
  Top Layer w20: U11.1 3541.99,4595 3546.99,4600 3806.99,4600 3816.99,4610 3816.99,5205 3821.99,5210 3875.73,5210 U1.10
WS: R8.1 U10.3 U11.3 | length 1590.3
  Top Layer w20: U11.3 3641.99,4435 3646.99,4430 3761.99,4430 3766.99,4425 3766.99,4225 3761.99,4220 3646.99,4220 3641.99,4215 3641.99,3840 3650.41,3831.57
  Top Layer w30: U10.3 3385.41,3981.57 3396.99,3970 3396.99,3840.12 3405.53,3831.57 3650.41,3831.57 R8.1
"": RLY1.3 SPK1.3 SPK1.4 SW1.3 SW1.4 SW1.5 U1.11 U1.12 U1.13 U1.14 U1.18 U1.19 U1.21 U1.23 U1.24 U1.25 U1.26 U1.27 U5.2 U5.3 U5.6 U5.7 U6.5 U6.6 U6.7 U6.10 U6.11 U6.12 U11.5 U11.6 U11.7 U13.1 U13.9 U13.10 U13.11 U13.12 U13.13 U13.14 U13.15 U13.16 USB1.7 USB1.A5 USB1.B5

## Polygon pours and split planes (outlines as drawn)
GND on Top Layer (solid, remove dead copper, pour order 2): 3026.99,3000 6991.99,3000 6991.99,6555 3026.99,6555
GND on Bottom Layer (solid, remove dead copper, pour order 3): 3026.99,3000 6991.99,3000 6991.99,6555 3026.99,6555
GND on Top Layer (solid, remove dead copper, pour order 0): 6317.76,3500 6571.99,3500 6611.99,3460 6611.99,3160 6546.99,3095 6376.99,3095 6356.99,3115 6356.99,3323.68 6317.76,3362.91
GND on Top Layer (solid, remove dead copper, pour order 1): 3651.99,5235 3741.99,5235 3756.99,5220 3756.99,4945 3736.99,4925 3661,4925 3651.99,4939.86

## Keep-outs
Board Outline Layer:
  lines w10 net "": 3049.36,3093.74 ccw(c3128.1,3093.74) 3128.1,3015 6900.87,3015 ccw(c6900.87,3093.74) 6979.61,3093.74 6979.61,6458.27 ccw(c6900.87,6458.27) 6900.87,6537.01 3128.1,6537.01 ccw(c3128.1,6458.27) 3049.36,6458.27 3049.36,3093.74

## Other copper
Top Layer:
  drawing of 149 lines, arcs and shapes, not listed
Bottom Layer:
  region net VOUT: 3256.32,5340 3241.58,5390 3239.93,5389.93 3238.21,5389.74 3236.41,5389.43 3233.58,5388.76 3229.61,5387.58 3221.17,5384.49 3205.96,5378.68 3201.78,5377.35 3198.75,5376.56 3195.84,5375.97 3193.97,5375.72 3192.17,5375.59 3190.46,5375.6 3188.82,5375.75 3188.03,5375.88 3187.27,5376.05 3186.53,5376.27 3185.82,5376.52 3185.13,5376.82 3184.47,5377.17 3183.84,5377.57 3183.24,5378.01 3182.66,5378.51 3182.12,5379.05 3181.6,5379.65 3175.78,5334.73 3179.83,5337.56 3183.07,5339.56 3186.2,5341.24 3188.63,5342.39 3191.01,5343.35 3193.34,5344.15 3195.63,5344.79 3197.89,5345.29 3200.12,5345.66 3202.33,5345.9 3205.08,5346.04 3207.82,5346.02 3211.11,5345.81 3215.56,5345.28 3230.45,5342.6 3239.88,5341.1 3246.55,5340.39 3252.94,5340.05
  region net VCC: 5471.99,6351.67 5431.99,6351.67 5432.05,6349.85 5432.23,6348.17 5432.5,6346.62 5433,6344.5 5434.04,6340.79 5434.29,6339.65 5434.45,6338.54 5434.49,6337.98 5434.49,6337.43 5434.46,6336.87 5434.38,6336.3 5434.27,6335.73 5434.1,6335.15 5433.88,6334.56 5433.62,6333.96 5433.29,6333.34 5432.9,6332.7 5432.45,6332.05 5431.34,6330.67 5476.34,6330.67 5475.41,6331.81 5474.62,6332.97 5473.96,6334.16 5473.41,6335.36 5472.97,6336.59 5472.62,6337.84 5472.36,6339.12 5472.17,6340.42 5471.99,6342.41 5471.92,6345.85
  region net D0: 3242.83,3505.79 3242.83,3535.79 3241.62,3535.83 3239.66,3536.03 3237.57,3536.38 3235.41,3536.88 3233.21,3537.51 3231.02,3538.25 3228.89,3539.1 3226.86,3540.04 3224.97,3541.06 3223.82,3541.78 3222.77,3542.52 3221.83,3543.29 3221.83,3498.29 3222.77,3499.06 3223.82,3499.8 3224.97,3500.52 3226.86,3501.54 3228.89,3502.48 3231.02,3503.33 3233.21,3504.07 3235.41,3504.7 3237.57,3505.2 3239.66,3505.55 3241.62,3505.75
  region net A0: 3242.83,3410 3242.83,3440 3235.7,3440.1 3232.95,3440.32 3230.94,3440.62 3229.63,3440.9 3228.35,3441.26 3227.09,3441.69 3225.86,3442.21 3224.67,3442.83 3223.5,3443.56 3222.38,3444.4 3221.83,3444.86 3221.83,3399.86 3224.65,3402.22 3227.08,3404.03 3229.63,3405.7 3231.61,3406.83 3233.64,3407.83 3235.02,3408.41 3236.42,3408.91 3237.83,3409.33 3239.25,3409.65 3240.68,3409.87 3242.11,3409.99
  region net JQ_BUSY: 5786.99,4751.79 5756.99,4751.79 5756.95,4750.57 5756.75,4748.61 5756.4,4746.53 5755.9,4744.36 5755.27,4742.17 5754.52,4739.98 5753.68,4737.84 5752.73,4735.81 5751.71,4733.93 5750.99,4732.78 5750.25,4731.73 5749.49,4730.79 5794.49,4730.79 5793.72,4731.73 5792.98,4732.78 5792.26,4733.93 5791.24,4735.81 5790.3,4737.84 5789.45,4739.98 5788.7,4742.17 5788.07,4744.36 5787.58,4746.53 5787.22,4748.61 5787.02,4750.57
  region net JQ_RX: 5686.99,4751.79 5656.99,4751.79 5656.95,4750.57 5656.75,4748.61 5656.4,4746.53 5655.9,4744.36 5655.27,4742.17 5654.52,4739.98 5653.68,4737.84 5652.73,4735.81 5651.71,4733.93 5650.99,4732.78 5650.25,4731.73 5649.49,4730.79 5694.49,4730.79 5693.72,4731.73 5692.98,4732.78 5692.26,4733.93 5691.24,4735.81 5690.3,4737.84 5689.45,4739.98 5688.7,4742.17 5688.07,4744.36 5687.58,4746.53 5687.22,4748.61 5687.02,4750.57
  region net JQ_TX: 5586.99,4751.79 5556.99,4751.79 5556.95,4750.57 5556.75,4748.61 5556.4,4746.53 5555.9,4744.36 5555.27,4742.17 5554.52,4739.98 5553.68,4737.84 5552.73,4735.81 5551.71,4733.93 5550.99,4732.78 5550.25,4731.73 5549.49,4730.79 5594.49,4730.79 5593.72,4731.73 5592.98,4732.78 5592.26,4733.93 5591.24,4735.81 5590.3,4737.84 5589.45,4739.98 5588.7,4742.17 5588.07,4744.36 5587.58,4746.53 5587.22,4748.61 5587.02,4750.57
  region net VBAT: 3516.99,6210 3566.99,6210 cw(c3637.61,6210) 3572.26,6236.78 3527.34,6236.78 ccw(c3556.8,6210)
  region net VIN: 4201.99,6425 4151.99,6425 ccw(c4168.03,6425) 4162.34,6410 4191.63,6410 ccw(c4185.94,6425)
  region net VOUT: 4701.99,6480 4651.99,6480 cw(c-5347.12,6480) 4651.74,6410 4651.99,6410 4701.99,6410 4701.74,6410 ccw(c-5297.12,6480)
  region net VBAT: 4451.99,6235 4501.99,6235 cw(c14502.23,6235) 4502.27,6310 4501.99,6310 4451.99,6310 4451.7,6310 cw(c-5548.25,6235)
  region net VCC: 3922.44,6095.87 3922.44,6135.87 3919.98,6135.78 3916.28,6135.41 3912.32,6134.94 3911.08,6134.86 3909.87,6134.85 3908.68,6134.94 3907.5,6135.12 3906.9,6135.27 3906.31,6135.44 3905.72,6135.65 3905.12,6135.9 3904.53,6136.2 3903.92,6136.53 3902.69,6137.35 3901.44,6138.37 3901.44,6093.37 3902.69,6094.38 3903.92,6095.2 3904.53,6095.53 3905.12,6095.83 3905.72,6096.08 3906.31,6096.29 3906.9,6096.47 3907.5,6096.61 3908.68,6096.8 3909.87,6096.88 3911.08,6096.87 3912.95,6096.73 3918.45,6096.07 3920.78,6095.9
  region net D0: 3840.75,5530.87 3840.75,5500.87 3841.96,5500.83 3843.92,5500.63 3846.01,5500.28 3848.17,5499.78 3850.37,5499.15 3852.56,5498.41 3854.69,5497.56 3856.72,5496.61 3858.61,5495.59 3859.76,5494.88 3860.81,5494.13 3861.75,5493.37 3861.75,5538.37 3860.81,5537.6 3859.76,5536.86 3858.61,5536.14 3856.72,5535.12 3854.69,5534.18 3852.56,5533.33 3850.37,5532.58 3848.17,5531.95 3846.01,5531.46 3843.92,5531.1 3841.96,5530.9
  region net A0: 3840.75,5425 3840.75,5395 3842.48,5395.05 3844.88,5395.28 3847.75,5395.77 3851.55,5396.48 3852.74,5396.62 3853.9,5396.68 3854.47,5396.67 3855.05,5396.62 3855.63,5396.55 3856.2,5396.44 3856.78,5396.29 3857.37,5396.1 3857.97,5395.87 3858.57,5395.59 3859.18,5395.25 3859.8,5394.87 3861.08,5393.93 3861.75,5393.37 3861.75,5438.37 3859.09,5435.87 3853.88,5430.67 3852.2,5429.18 3851.04,5428.28 3849.84,5427.47 3848.57,5426.75 3847.23,5426.15 3845.79,5425.66 3844.24,5425.3 3842.57,5425.08
  region net JQ_TX: 4977.32,5303.37 4977.32,5328.37 4975.9,5328.42 4974.48,5328.59 4973.06,5328.86 4971.64,5329.23 4970.24,5329.68 4968.85,5330.21 4966.79,5331.15 4964.77,5332.22 4962.82,5333.41 4960.32,5335.14 4957.97,5336.96 4956.32,5338.37 4956.32,5293.37 4959.12,5295.69 4961.55,5297.47 4964.11,5299.12 4966.11,5300.24 4968.15,5301.23 4969.54,5301.8 4970.94,5302.29 4972.35,5302.7 4973.77,5303.02 4975.19,5303.24 4976.61,5303.35
  region net JQ_RX: 4977.32,5410 4977.32,5440 4976.19,5439.94 4974.95,5439.77 4972.93,5439.38 4966.28,5437.77 4964.06,5437.33 4962.63,5437.13 4961.26,5437.03 4960.6,5437.03 4959.97,5437.05 4959.36,5437.11 4958.77,5437.21 4958.22,5437.35 4957.69,5437.53 4957.2,5437.76 4956.74,5438.04 4956.32,5438.37 4956.32,5393.37 4957.97,5394.92 4959.41,5396.47 4960.97,5398.36 4963.79,5402.28 4965.41,5404.51 4966.11,5405.37 4966.85,5406.18 4967.37,5406.69 4967.91,5407.16 4968.48,5407.61 4969.08,5408.02 4969.72,5408.4 4970.4,5408.74 4971.13,5409.04 4971.92,5409.31 4972.75,5409.53 4973.65,5409.71 4974.61,5409.85 4976.18,5409.98
  region net JQ_BUSY: 4977.32,5500 4977.32,5530 4976.09,5530.05 4974.79,5530.19 4973.44,5530.41 4971.32,5530.9 4969.14,5531.54 4966.95,5532.33 4964.79,5533.23 4962.69,5534.22 4960.71,5535.29 4958.89,5536.42 4957.27,5537.58 4956.32,5538.37 4956.32,5493.37 4957.31,5494.18 4958.39,5494.93 4959.55,5495.63 4960.78,5496.28 4962.73,5497.16 4964.78,5497.92 4966.9,5498.55 4969.04,5499.08 4971.19,5499.48 4973.31,5499.77 4975.36,5499.94
  region net $1N21198: 6566.55,4539.22 6566.55,4569.22 cw(c6566.55,4646.17) 6521.55,4583.74 6521.55,4524.69 cw(c6566.55,4462.26)
  region net $1N21189: 6566.56,4445 6566.56,4475 cw(c6566.56,4578.34) 6521.56,4485.31 6521.56,4426.26 cw(c6566.56,4381.61)
  region net VCC: 6361.99,6100 6361.99,6060 cw(c6361.99,5631.22) 6421.99,6055.78 6421.99,6104.22 cw(c6361.99,6528.78)
  region net VCC: 5471.99,6330 5431.99,6330 ccw(c5231.99,6330) 5391.99,6450 5511.99,6450 ccw(c5671.99,6330)
  region net JQ_TX: 5584.49,5262.43 5559.49,5262.43 ccw(c5750.64,5262.43) 5561.49,5234.85 5582.49,5234.85 ccw(c5393.33,5262.43)

## Silkscreen, mask and mechanical layers (free items; w line width, h text height)
Top Silkscreen Layer:
  text "电源模块" at 3427.36,6283.81 h101.95
  text "WIFI通讯" at 6432.77,6176.72 h90.62
  text "220nF" at 3615.24,6123.32 h38.94
  text "L7805" at 3600.24,6018.32 h38.94
  text "ST7789" at 5502.1,5657.59 h90.62
  text "ESP8266" at 6650.27,5516.01 h90.62 r90
  text "104" at 3498.66,5508.32 h38.94
  text "AMS1117" at 3591.82,5498.32 h38.94
  text "22uF" at 3732.15,5093.36 h45.31
  text "104" at 3382.04,5043.36 h45.31
  text "10uF" at 3267.15,5023.36 h45.31
  text "104" at 3737.04,4953.36 h45.31
  text "3K" at 3486.93,4903.36 h45.31
  text "温度传感器" at 3333.71,4739.44 h90.62 r270
  text "声光报警 /     指示" at 6334.57,4653.33 h138.39
  text "LM393" at 3562.49,4593.88 h25.96
  text "1K" at 6405.96,4581.48 h45.31
  text "RED" at 6026.99,4470 h60
  text "S8050" at 6342.26,4398.36 h45.31
  text "10K" at 3460.93,4342.7 h45.31
  text "液位传感器" at 3338.71,4284.44 h90.62 r270
  text "10K" at 3607.04,4273.36 h45.31
  text "2K" at 6056.93,4208.36 h45.31
  text "S8050" at 6342.26,4173.36 h45.31
  text "10K" at 3627.04,4098.36 h45.31
  text "蜂鸣器" at 6567.09,4051.72 h90.62
  text "1K" at 4851.89,3962.54 h67.97
  text "1N4148" at 6777.38,3938.36 h45.31
  text "AG32VF303 /       smart /  infusion set" at 3821.99,3830 h70
  text "滴速传感器" at 3338.71,3769.45 h90.62 r270
  text "ULN2003" at 5231.82,3753.32 h38.94
  text "步电 /  进机 /  状态" at 4815.34,3678.9 h93.19
  text "感度调节" at 3477.32,3656.72 h90.62
  text "2W加热片" at 6605.27,3650.55 h90.62 r90
  text "+" at 6556.99,3562.57 h52.3
  text "2022009225 /  2024/05/17" at 3811.99,3540 h70
  text "滴速控制" at 5212.32,3501.72 h90.62
  text "4.7K" at 3457.15,3438.36 h45.31
  text "4.7K" at 3942.15,3438.36 h45.31
  text "4.7K" at 4446.04,3437.7 h45.31
  text "-" at 6604.42,3360 h52.3 r90
  text "BLUE" at 6011.99,3275 h60
  text "1K" at 6411.93,3133.36 h45.31
  text "加热指示" at 6052.32,3081.72 h90.62
  text "设置" at 3611.8,3070.08 h135.94
  text "+键" at 4121.8,3070.08 h135.94
  text "-键" at 4641.8,3070.08 h135.94
Bottom Silkscreen Layer:
  circle w10 net "": c4431.66,4013.63 r452.76
  lines w10 net "": 5038.13,4795.12 ccw(c5077.5,4795.12) 5077.5,4755.75 6573.56,4755.75 ccw(c6573.56,4795.12) 6612.93,4795.12 6612.93,5897.48 ccw(c6573.56,5897.48) 6573.56,5936.85 5077.5,5936.85 ccw(c5077.5,5897.48) 5038.13,5897.48 5038.13,4795.12
  text "-" at 3646.99,6402.57 h52.3
  text "+" at 3551.99,6391.36 h78.45
  text "电池区域" at 6032.48,5230.08 h135.94
  text "JLCJLCJLCJLC" at 4764.56,5061.64 h77.88
  text "-" at 6634.56,4575 h52.3 r90
  text "+" at 6601.99,4437.57 h52.3
  text "扬声器" at 4602.14,3960.08 h135.94

## Text inside footprints (layer, text, board x,y; h text height)
BUZZER1: Top Silkscreen Layer "+" at 6566.63,4420.39 h32.69
TFT1: Top Silkscreen Layer "IPS 240*240" at 5242.98,4891.64 h77.88; Top Silkscreen Layer "GND" at 5294.22,6201.1 h32.45; Top Silkscreen Layer "VCC" at 5404.22,6201.1 h32.45; Top Silkscreen Layer "SCL" at 5514.22,6201.1 h32.45; Top Silkscreen Layer "BLK" at 5919.22,6201.1 h32.45; Top Silkscreen Layer "DC" at 5830.64,6201.1 h32.45; Top Silkscreen Layer "RES" at 5714.22,6201.1 h32.45; Top Silkscreen Layer "SDA" at 5609.22,6201.1 h32.45
U1: Top Silkscreen Layer "3V3" at 3943.17,6087.91 h60; Top Silkscreen Layer "GND" at 3948.17,5982.91 h60; Top Silkscreen Layer "25" at 3966.99,5885 h60; Top Silkscreen Layer "26" at 3966.99,5785 h60; Top Silkscreen Layer "27" at 3966.99,5680 h60; Top Silkscreen Layer "28" at 3966.99,5585 h60; Top Silkscreen Layer "29" at 3966.99,5490 h60; Top Silkscreen Layer "32" at 3966.99,5385 h60; Top Silkscreen Layer "33" at 3966.99,5290 h60; Top Silkscreen Layer "35" at 3971.99,5185 h60; Top Silkscreen Layer "30" at 3946.99,5090 h60; Top Silkscreen Layer "31" at 3971.99,4990 h60; Top Silkscreen Layer "40" at 3966.99,4885 h60; Top Silkscreen Layer "41" at 3971.99,4780 h60; Top Silkscreen Layer "42" at 3966.99,4685 h60; Top Silkscreen Layer "43" at 3966.99,4585 h60; Top Silkscreen Layer "45" at 3966.99,4485 h60; Top Silkscreen Layer "46" at 3966.99,4385 h60; Top Silkscreen Layer "RST" at 3951.99,4285 h60; Top Silkscreen Layer "GND" at 3946.99,4185 h60; Top Silkscreen Layer "5V" at 4786.99,6085 h60; Top Silkscreen Layer "GND" at 4766.99,4285 h60; Top Silkscreen Layer "VBT" at 4766.99,4180 h60; Top Silkscreen Layer "3" at 4806.99,4375 h60; Top Silkscreen Layer "4" at 4806.99,4475 h60; Top Silkscreen Layer "5" at 4811.99,4580 h60; Top Silkscreen Layer "6" at 4811.99,4685 h60; Top Silkscreen Layer "10" at 4796.99,4780 h60; Top Silkscreen Layer "11" at 4796.99,4885 h60; Top Silkscreen Layer "12" at 4791.99,4980 h60; Top Silkscreen Layer "13" at 4791.99,5080 h60; Top Silkscreen Layer "14" at 4791.99,5185 h60; Top Silkscreen Layer "15" at 4791.99,5285 h60; Top Silkscreen Layer "16" at 4791.99,5385 h60; Top Silkscreen Layer "17" at 4791.99,5485 h60; Top Silkscreen Layer "18" at 4786.99,5580 h60; Top Silkscreen Layer "19" at 4786.99,5685 h60; Top Silkscreen Layer "20" at 4786.99,5780 h60; Top Silkscreen Layer "21" at 4791.99,5885 h60; Top Silkscreen Layer "22" at 4786.99,5985 h60; Top Silkscreen Layer "JTAG" at 4266.99,4175 h120; Top Silkscreen Layer "TYPE-C" at 4655.53,6215 h60 r180; Top Silkscreen Layer "AG32VF303CCT6 /      DEV BOARD" at 4526.99,4745 h120 r90
U9: Top Silkscreen Layer "+" at 3111.29,4659.02 h52.3 r270; Top Silkscreen Layer "-" at 3111.29,4456.47 h52.3 r270; Top Silkscreen Layer "DQ" at 3116.09,4570.67 h38.94 r270
U10: Top Silkscreen Layer "-" at 3118.31,4197.52 h39.22 r270; Top Silkscreen Layer "+" at 3119.1,4100.47 h39.22 r270; Top Silkscreen Layer "S" at 3116.54,3993.98 h39.22 r270
U12: Top Silkscreen Layer "+" at 3119.89,3737.32 h39.22 r270; Top Silkscreen Layer "-" at 3119.1,3636.93 h39.22 r270; Top Silkscreen Layer "D0" at 3117.67,3551.14 h38.94 r270; Top Silkscreen Layer "A0" at 3117.67,3454.69 h38.94 r270
U13: Top Silkscreen Layer "DAC" at 5845.31,4288.32 h38.94 r270; Top Silkscreen Layer "I01" at 5750.31,4268.32 h38.94 r270; Top Silkscreen Layer "I02" at 5655.31,4273.32 h38.94 r270; Top Silkscreen Layer "I03" at 5555.31,4273.32 h38.94 r270; Top Silkscreen Layer "I04" at 5455.31,4268.32 h38.94 r270; Top Silkscreen Layer "I05" at 5355.31,4263.32 h38.94 r270; Top Silkscreen Layer "I06" at 5255.31,4263.32 h38.94 r270; Top Silkscreen Layer "I07" at 5155.31,4263.32 h38.94 r270; Top Silkscreen Layer "SPK+" at 5160.31,4670.03 h38.94 r270; Top Silkscreen Layer "SPK-" at 5255.31,4670.03 h38.94 r270; Top Silkscreen Layer "5V" at 5355.31,4646.61 h38.94 r270; Top Silkscreen Layer "GND" at 5450.31,4663.32 h38.94 r270; Top Silkscreen Layer "TX" at 5560.31,4651.61 h38.94 r270; Top Silkscreen Layer "RX" at 5650.31,4651.61 h38.94 r270; Top Silkscreen Layer "VPP" at 5850.31,4663.32 h38.94 r270; Top Silkscreen Layer "BUSY" at 5750.31,4660.03 h38.94 r270
U14: Bottom Silkscreen Layer "VIN" at 4220.31,6266.68 h38.94 r90; Bottom Silkscreen Layer "GND" at 4320.31,6276.68 h38.94 r90; Bottom Silkscreen Layer "GND" at 4425.31,6276.68 h38.94 r90; Bottom Silkscreen Layer "BAT" at 4520.31,6276.68 h38.94 r90; Bottom Silkscreen Layer "OUT" at 4720.31,6276.68 h38.94 r90; Bottom Silkscreen Layer "GND" at 4620.31,6276.68 h38.94 r90; Bottom Silkscreen Layer "IR0" at 4484.75,6035.57 h51.92 r90; Bottom Silkscreen Layer "IP5306" at 4354.03,5691.1 h32.45